# EAGLE board ptn1 (EAGLE 5.06)
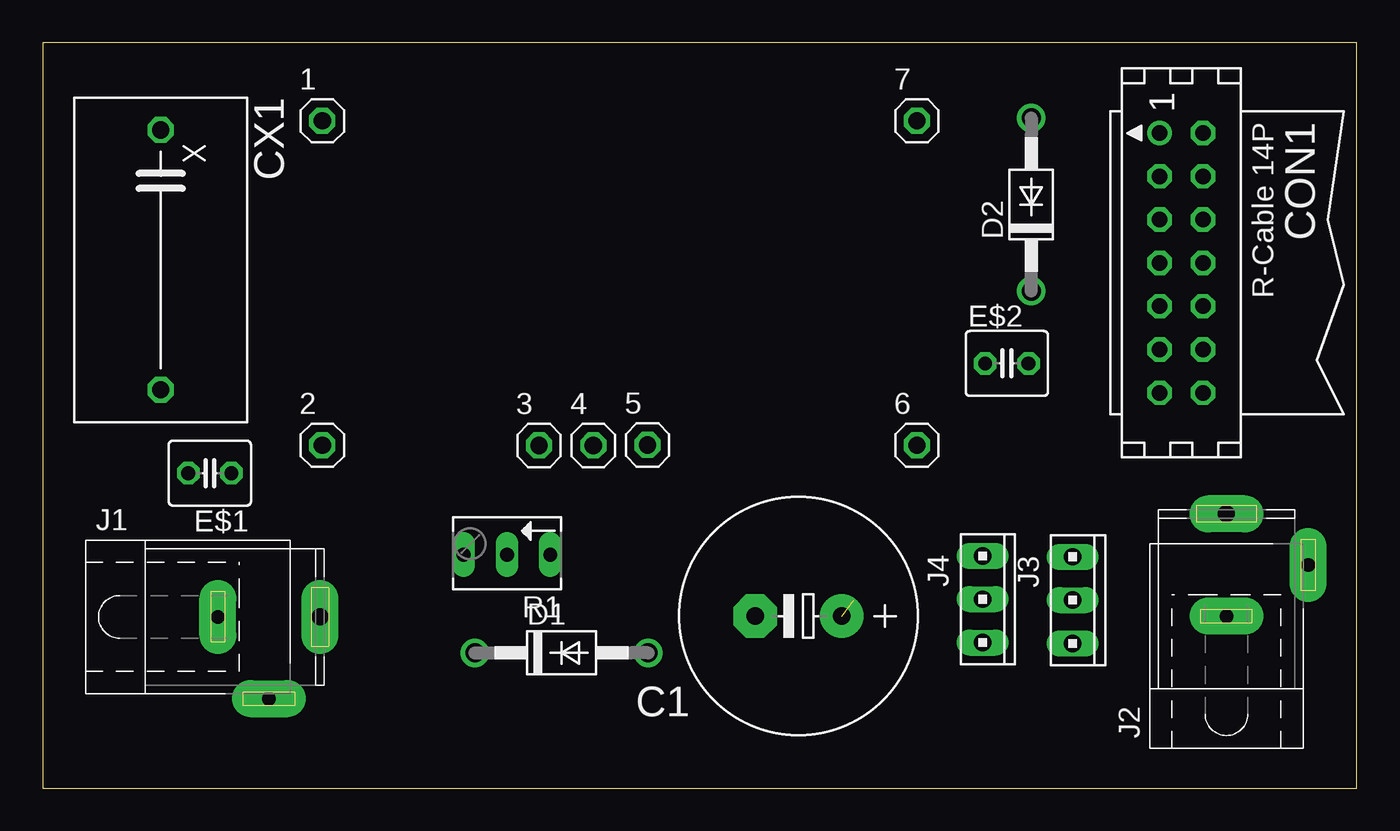
[diagram p0: board, top side]
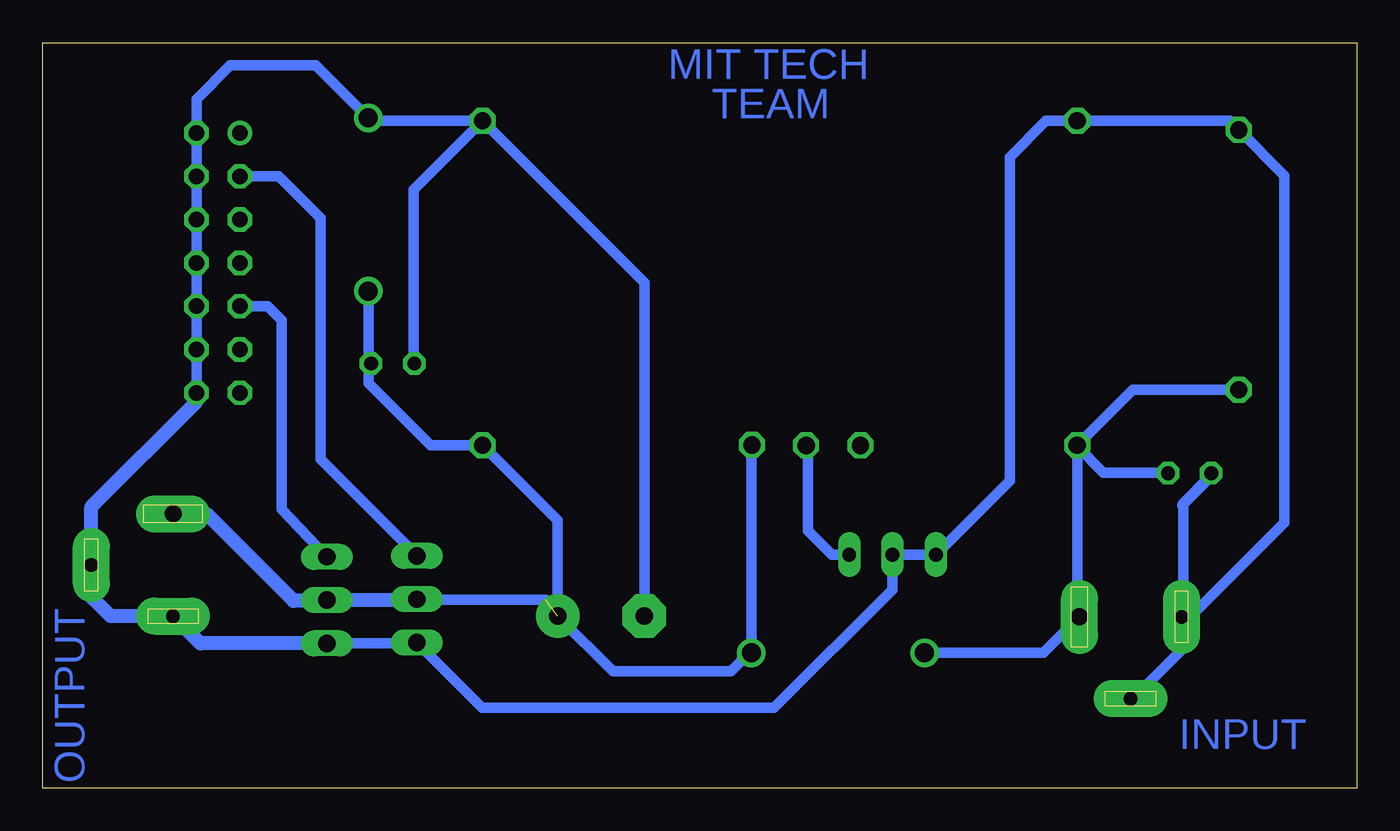
[diagram p1: board, bottom side, seen from below]

Size 77.13 x 43.75 mm. Coordinates in mm from the lower left corner, seen from the top.
Outline: 0,0 77.13,0 77.13,43.75 0,43.75 0,0
Copper layers (1*16): Top 0.035mm / dielectric 1.5mm / Bottom 0.035mm
Design rules "default": minimum track width 10mil, minimum drill 24mil, track to track 8mil, track to pad 8mil, pad to pad 8mil, via to via 8mil, smd to smd 8mil, copper to edge 40mil, drill to drill 8mil, minimum pad ring 10mil, minimum via ring 8mil, stop-mask expansion 4mil, vias tented up to drill 0mil, thermal gap 10mil

## Footprints (pad centres in the part's own frame; a part is rotated, then mirrored left to right if it is on the bottom)
1X01 = drill 1.016 octagon: 1 0,0
E5-13 = drill 1.016 pad 2.54 round: + -2.54,0 | drill 1.016 pad 2.54 octagon: - 2.54,0
CON14 = drill 0.914 round: 1 -7.62,-1.27 | drill 0.914 octagon: 2 -7.62,1.27; 3 -5.08,-1.27; 4 -5.08,1.27; 5 -2.54,-1.27; 6 -2.54,1.27; 7 0,-1.27; 8 0,1.27; 9 2.54,-1.27; 10 2.54,1.27; 11 5.08,-1.27; 12 5.08,1.27; 13 7.62,-1.27; 14 7.62,1.27
XC15B10 = drill 1.016 octagon: 1 -7.62,0; 2 7.62,0
DO41-10 = drill 1.118 round: A 5.08,0; C -5.08,0
C025-040X050 = drill 0.813 octagon: 1 -1.27,0; 2 1.27,0
SPC4078 = drill 0.8 pad 2.184 long: 1 -3,0; 2 0,-4.8 | drill 1 pad 2.184 long: 3 3,0
10X03MTA = drill 1.016 long: 1 2.54,0; 2 0,0; 3 -2.54,0
B64Y = drill 0.813 long: A 2.54,0; E -2.54,0; S 0,0

## Placement (x,y rotation side)
1  [1X01]  16.41,39.16 0 top
2  [1X01]  16.41,20.13 0 top
3  [1X01]  29.13,20.12 0 top
4  [1X01]  32.32,20.12 0 top
5  [1X01]  35.5,20.15 0 top
6  [1X01]  51.31,20.13 0 top
7  [1X01]  51.31,39.16 0 top
C1  [E5-13]  44.36,10.11 180 top
CON1  [CON14]  66.83,30.83 270 top
CX1  [XC15B10]  6.93,31 270 top
D1  1N4004  [DO41-10]  30.46,7.95 0 top
D2  1N4004  [DO41-10]  58.01,34.25 90 top
E$1  [C025-040X050]  9.81,18.49 180 top
E$2  [C025-040X050]  56.59,24.93 0 top
J1  [SPC4078]  13.28,10.06 0 top
J2  [SPC4078]  69.47,13.1 90 top
J3  [10X03MTA]  60.45,11.05 270 top
J4  [10X03MTA]  55.16,11.1 270 top
R1  [B64Y]  27.25,13.71 180 top

## Library data of the parts
1-7 = pinhead
C1 CX1 E$1 E$2 = rcl
CON1 = con-harting
D1 D2 = diode
J1 J2 = con-jack
J3 J4 = con-amp
R1 = pot

## Nets
N$1: 2.1 CX1.2 D1.C J1.3
N$2: CON1.3 J4.3
N$3: CON1.9 J3.3
N$5: 4.1 R1.E
N$7: 1.1 7.1 C1.- CON1.2 CON1.4 CON1.6 CON1.8 CON1.10 CON1.12 CON1.14 CX1.1 D2.A J1.1 J1.2 J2.1 J2.2 J3.1 J4.1 R1.A R1.S
N$8: 5.1 6.1 C1.+ D1.A D2.C J2.3 J3.2 J4.2

## Tracks (layer width: path | path; a pad name or v marks a point on that pad's centre or on a via)
N$1
  Bottom 0.61: CX1.2 13.16,23.38 2.1 16.41,10.19 J1.3 18.39,7.95 D1.C
N$2
  Bottom 0.61: CON1.3 63.27,35.9 60.82,33.46 60.82,19.3 J4.3
N$3
  Bottom 0.61: CON1.9 63.92,28.28 63.1,27.46 63.1,16.39 J3.3
N$5
  Bottom 0.61: 4.1 32.22,20.02 32.22,15.11 30.82,13.7 R1.E
N$7
  Bottom 0.61: CON1.14 CON1.12 CON1.10 CON1.8 CON1.6 CON1.4 CON1.2 68.1,40.44 66.12,42.42 61.1,42.42 D2.A 57.84,39.16 7.1 41.82,29.66 C1.- | J1.2 13.15,5.26 10.19,8.21 10.19,9.97 J1.1 | 8.68,18.24 10.19,16.73 10.19,10.15 J1.1 | J1.1 9.77,10.06 4.26,15.57 4.26,35.95 CX1.1 7.47,39.16 1.1 18.25,39.16 20.38,37.03 20.38,18.04 R1.A R1.S 27.25,11.67 34.2,4.72 51.33,4.72 J4.1 55.21,8.51 J3.1
  Bottom 0.813: CON1.14 68.1,22.69 74.27,16.51 74.27,14.02 | 74.27,14.02 J2.2 | 74.27,14.02 74.19,13.95 74.19,11.15 73.14,10.1 J2.1 67.88,8.51 J3.1 | J4.1
N$8  (1 unrouted)
  Bottom 0.61: D2.C 58,23.76 54.37,20.13 6.1 46.9,15.71 C1.+ 43.66,6.87 36.75,6.87 35.66,7.95 D1.A 35.54,20.11 5.1 | J4.2 55.13,11.07 47.6,11.07
  Bottom 0.813: J2.3 67.51,16.1 62.4,10.99 60.5,10.99 J3.2 55.21,11.05 J4.2
S$9
  Bottom 0.61: 8.39,18.45 10.24,16.6
S$13
  Bottom 0.61: 11.14,18.52 14.87,18.52 16.45,20.1
S$14
  Bottom 0.61: 55.37,24.88 55.37,35.11 51.26,39.21 51.34,39.21 51.42,39.3

## Text on the board
Bottom: MIT TECH | TEAM | OUTPUT | INPUT